# Altium PCB PCB1.PcbDoc (part 2 of 2)
Units mm, origin at the board's own origin, x right, y up, seen from the top; angles counter-clockwise.
Board outline 127.5 x 103 mm, 2 copper layers (Top Layer, Bottom Layer); 113 components, 82 nets, 373 pads, 162 vias.
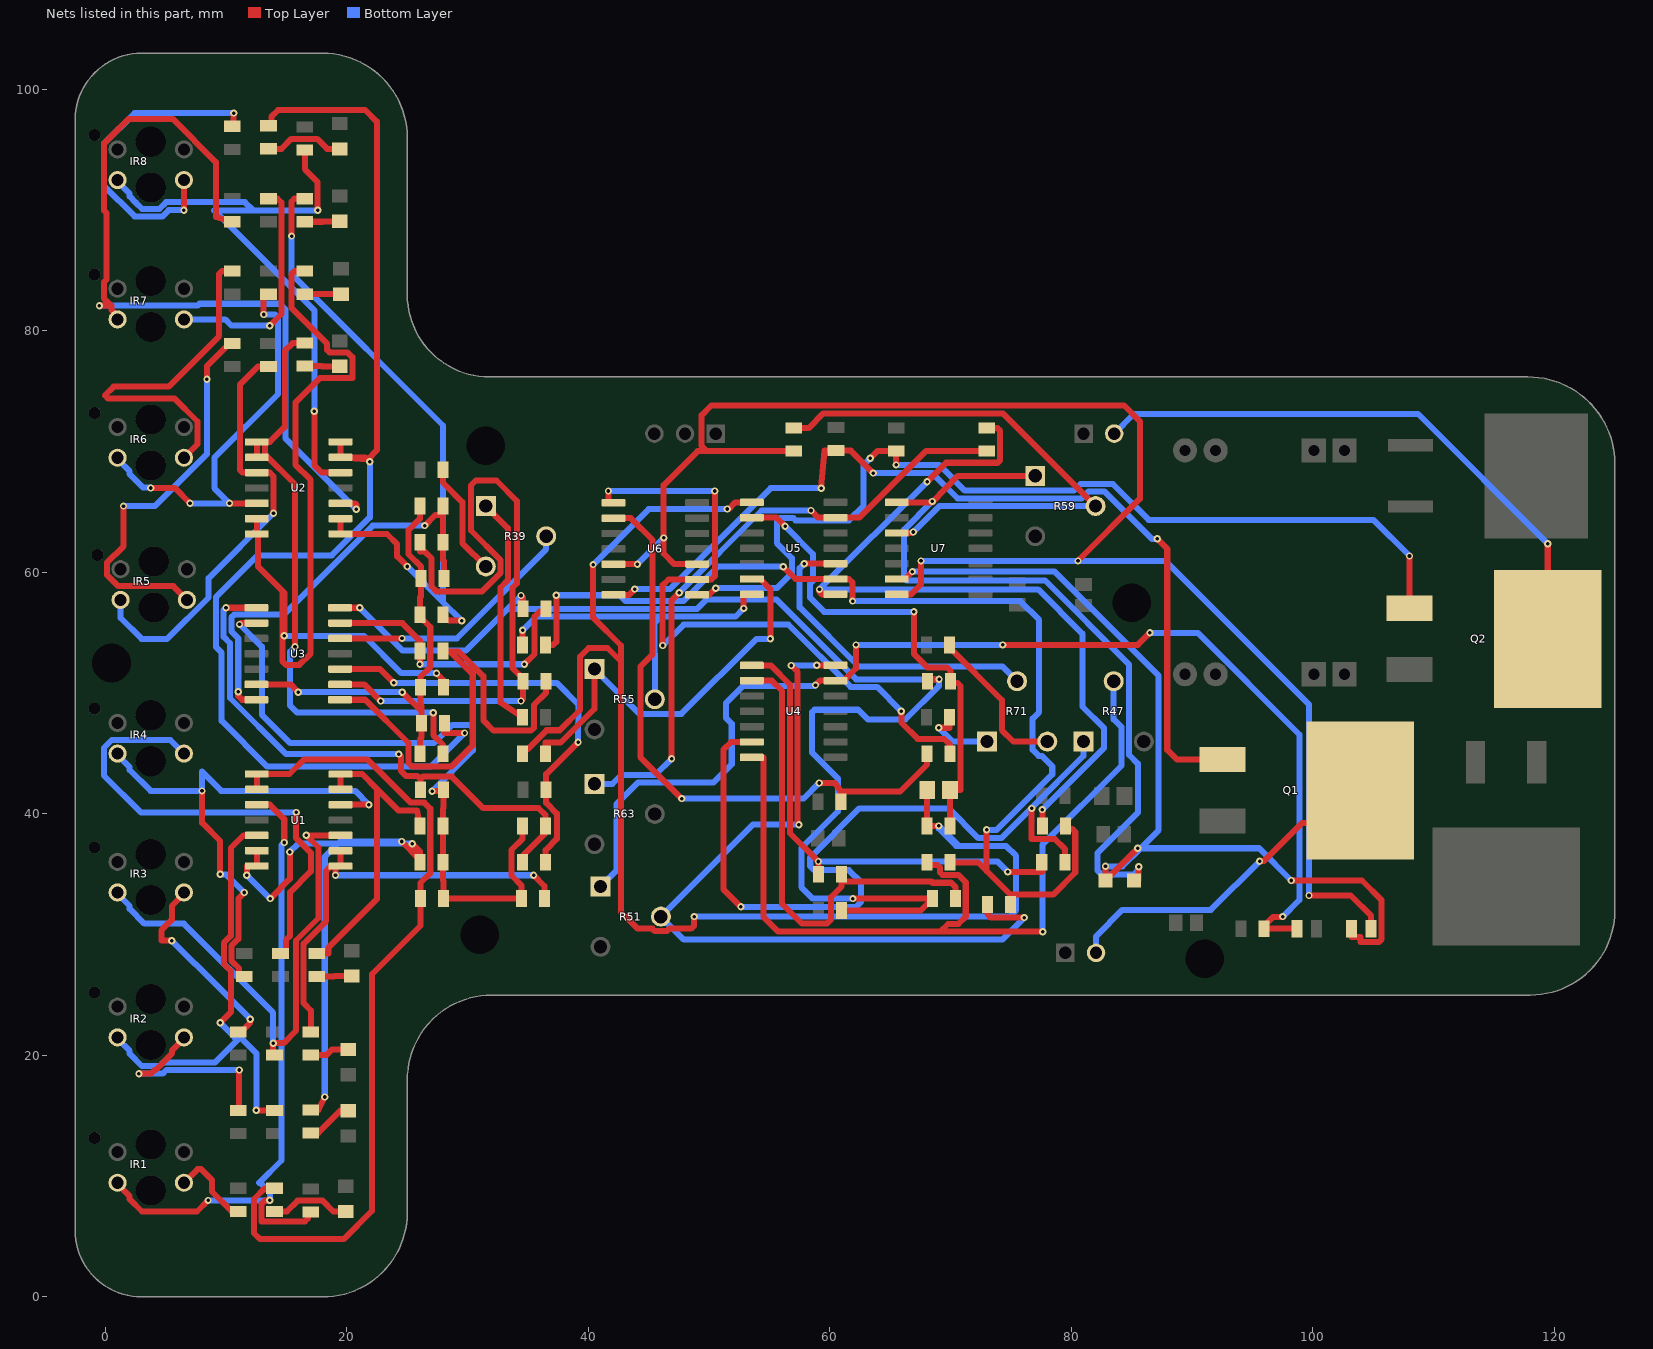
[diagram p2: the nets of this part, all layers, seen from the top]

## Via types
v1: diameter 0.6, hole 0.3, Top Layer to Bottom Layer, 162 vias

## Nets (pads, with @x,y where several pads share a name; then routed paths per layer and width w, separated by ;. In a path a pad name is that pad's centre, name@x,y a point inside that pad or via, vN(x,y) a via of type N, cw(c..) or ccw(c..) an arc to the next point about the centre after c; other vN are vias at no path point) (continued)
NetC3_2: C3.2 R51.1 R53.2 U4.13 | length 98.5
  Top Layer w0.5: v1(58.801,50.673) 59.168,51.04 U4.13@60.465,51.04 61.145,51.04 62.154,52.049 v1(62.154,54) ; v1(74.303,54) 85.5,54 v1(86.5,55) ; v1(97.5,31.5) 97.481,31.481 96.706,31.481 95.955,30.73 R53.2@95.955,30.5 C3.2@98.687,30.5
  Bottom Layer w0.5: R51.1@41,34 42.342,35.342 42.342,40.843 44.094,42.596 50.343,42.596 51.867,44.12 51.867,47.473 51.41,47.93 51.41,49.2 52.827,50.617 58.745,50.617 v1(58.801,50.673) ; v1(62.154,54) v1(74.303,54) ; v1(86.5,55) 90.461,55 98.888,46.574 98.888,32.888 v1(97.5,31.5)
NetC4_1: C4.1 R54.1 R56.2 U5.2 | length 40.6
  Top Layer w0.5: U5.2@53.535,64.54 55.577,64.54 v1(56.286,63.83) ; v1(66.954,56.744) 66.954,53.264 68.072,52.146 69.698,52.146 70,51.844 R56.2@70,51 70,50.851 70.561,50.851 70.815,50.597 70.815,42 C4.1@69.95,42 69.95,40.493 69.955,40.488 R54.1@69.955,39
  Bottom Layer w0.5: v1(56.286,63.83) 58.598,61.519 58.598,59.309 58.356,59.068 58.356,57.912 59.525,56.744 v1(66.954,56.744)
NetC4_2: C4.2 R54.2 R57.1 U5.1 | length 112.9
  Top Layer w0.5: R57.1@34.545,45 34.545,45.364 34.976,45.364 36.544,46.933 37.622,46.933 39.298,48.609 39.298,53.035 40.009,53.746 41.58,53.746 42.697,52.629 ; v1(40.386,60.655) 40.386,56.261 42.697,53.95 42.697,52.629 ; v1(48.758,31.5) 48.739,31.481 48.739,30.739 48.5,30.5 46.7,30.5 46.498,30.298 45.502,30.298 45.3,30.5 44.074,30.5 42.697,31.877 42.697,52.629 ; v1(51.486,65.253) 51.614,65.253 52.172,65.81 U5.1@53.535,65.81 ; R54.2@68.045,39 R54.2@68.045,39.014 ; C4.2@68.05,42 68.05,40.493 68.045,40.488 R54.2@68.045,39.014 ; v1(69.012,39.014) R54.2@68.045,39.014
  Bottom Layer w0.5: v1(40.386,60.655) 44.983,65.253 v1(51.486,65.253) ; v1(48.758,31.5) 74.883,31.5 75.413,32.029 75.413,36.525 74.574,37.363 70.663,37.363 ; 70.663,37.363 70.46,37.363 69.012,38.811 v1(69.012,39.014) 70.663,37.363
NetC5_1: C5.1 R58.2 U7.6 | length 77.8
  Top Layer w0.5: U7.6@65.535,59.46 66.218,59.46 v1(66.829,60.071) ; v1(82.825,35.662) R58.2@82.825,34.5 v1(85.485,37.16) ; v1(98.211,34.493) 104.064,34.493 105.664,32.893 105.664,29.591 105.461,29.388 103.937,29.388 103.937,29.794 103.187,29.794 C5.1@103.187,30.5
  Bottom Layer w0.5: v1(66.829,60.071) 78.613,60.071 87.224,51.46 87.224,38.659 v1@85.725,37.16 ; v1(82.825,35.662) 84.226,35.662 v1@85.725,37.16 ; v1(85.485,37.16) v1@85.725,37.16 ; v1(98.211,34.493) 95.544,37.16 v1@85.725,37.16
NetD1_1: D1.1 R1.1 | length 2.9
  Top Layer w0.5: R1.1@16.5,77.09 17.932,77.09 17.945,77.077 D1.1@19.398,77.077
NetD2_1: D2.1 R2.1 | length 6.6
  Top Layer w0.5: R2.1@14,7.09 15.037,7.09 15.922,7.976 17.983,7.976 18.882,7.077 D2.1@19.898,7.077
NetD3_1: D3.1 R7.1 | length 3
  Top Layer w0.5: R7.1@16.5,83.045 D3.1@19.5,83.045
NetD4_1: D4.1 R8.1 | length 3.9
  Top Layer w0.5: R8.1@17,13.59 17.628,13.59 19.461,15.423 D4.1@20.102,15.423
NetD5_1: D5.1 R13.1 | length 2.9
  Top Layer w0.5: R13.1@16.5,89.045 17.964,89.045 17.996,89.077 D5.1@19.398,89.077
NetD6_1: D6.1 R14.1 | length 3.3
  Top Layer w0.5: R14.1@17,20.045 18.313,20.045 18.768,20.5 D6.1@20.102,20.5
NetD7_1: D7.1 R19.1 | length 6.6
  Top Layer w0.5: R19.1@13.5,95.09 14.58,95.09 15.4,95.91 17.526,95.91 18.359,95.077 D7.1@19.398,95.077
NetD8_1: D8.1 R20.1 | length 2.9
  Top Layer w0.5: R20.1@17.5,26.545 18.923,26.545 18.955,26.577 D8.1@20.398,26.577
NetIR1_A: IR1.A R5.2 | length 7
  Top Layer w0.5: IR1.A@6.5,9.46 7.632,10.592 7.925,10.592 8.814,9.703 8.814,8.738 10.461,7.09 R5.2@11,7.09
NetIR1_COLL: IR1.COLL R6.1 U1.3 | length 56.8
  Top Layer w0.5: IR1.COLL@1,9.46 1,9.339 2,8.339 2,8.105 3.025,7.08 7.58,7.08 v1(8.5,8) ; U1.3@12.535,40.77 13.614,40.77 14.808,39.576 v1(14.808,37.643) ; v1(13.614,8.001) 13.212,8.001 12.933,7.722 12.933,6.248 16.51,6.248 16.764,6.502 16.764,7.045 R6.1@17,7.045
  Bottom Layer w0.5: v1@8.501,8 v1(13.614,8.001) 13.614,8.661 12.816,9.46 12.737,9.46 14.58,11.303 14.58,37.414 v1(14.808,37.643)
NetIR2_A: IR2.A R11.2 | length 17
  Top Layer w0.5: v1(2.774,18.491) 2.793,18.51 3.788,18.51 4.074,18.796 4.151,18.796 5.5,20.145 5.5,20.379 6.5,21.379 IR2.A@6.5,21.5 ; R11.2@11,15.455 11.074,15.455 v1(11.074,18.796)
  Bottom Layer w0.5: v1(2.774,18.491) 4.733,18.491 5.038,18.796 v1(11.074,18.796)
NetIR2_COLL: IR2.COLL R12.1 U1.5 | length 40.5
  Top Layer w0.5: v1(9.5,22.706) 10.389,23.594 10.389,26.997 9.806,27.579 9.806,29.331 10.389,29.913 10.389,37.186 11.433,38.23 U1.5@12.535,38.23 ; v1(12.497,15.455) R12.1@14,15.455
  Bottom Layer w0.5: IR2.COLL@1,21.5 1,21.379 2,20.379 2,20.145 3.025,19.12 4.475,19.12 4.778,19.423 9.087,19.423 11.164,21.5 ; v1(9.5,22.706) 10.706,21.5 11.164,21.5 ; v1(12.497,15.455) 12.497,20.168 11.164,21.5
NetIR3_A: IR3.A R17.2 | length 16.4
  Top Layer w0.5: v1(5.5,29.5) 5.481,29.519 4.626,29.519 4.626,30.355 5.5,31.229 5.5,32.379 6.5,33.379 IR3.A@6.5,33.5 ; R17.2@11,21.955 11.23,21.955 11.981,22.706 11.981,22.981 v1(12,23)
  Bottom Layer w0.5: v1(5.5,29.5) 7.442,27.558 7.477,27.558 11.981,23.053 11.981,23.019 v1(12,23)
NetIR3_COLL: IR3.COLL R18.1 U1.10 | length 43.3
  Top Layer w0.5: R18.1@14,20.045 13.894,20.045 v1(13.894,21.006) 13.913,21.025 14.753,21.025 15.781,22.053 15.781,29.519 17.645,31.383 17.645,37.222 v1(16.637,38.23) U1.10@19.465,38.23
  Bottom Layer w0.5: IR3.COLL@1,33.5 1,33.379 2,32.379 2,32.145 3.224,30.921 6.5,30.921 13.894,23.527 v1(13.894,21.006)
NetIR4_A: IR4.A R23.2 | length 40.2
  Top Layer w0.5: R23.2@14.5,28.455 14.73,28.455 14.94,28.665 14.94,29.564 15.291,29.915 15.291,33.528 17.018,35.255 17.018,36.779 15.799,37.998 v1(15.799,40.132)
  Bottom Layer w0.5: IR4.A@6.5,45 5.373,46.127 0.533,46.127 -0.127,45.467 -0.127,43.189 2.93,40.132 v1(15.799,40.132)
NetIR4_COLL: IR4.COLL R24.1 U1.12 | length 45.5
  Top Layer w0.5: v1(8,41.91) 8,39.264 9.5,37.764 v1(9.5,35) ; R24.1@11.5,26.545 11.27,26.545 11.06,26.755 11.06,27.212 10.433,27.839 10.433,29.071 11.016,29.654 11.016,32.989 11.5,33.473 v1(11.5,33.5) ; U1.12@19.465,40.77 v1(21.819,40.77)
  Bottom Layer w0.5: IR4.COLL@1,45 1,44.879 2,43.879 2,43.645 3.735,41.91 v1(8,41.91) 8,43.5 9.59,41.91 20.679,41.91 v1(21.819,40.77) ; v1(9.5,35) 9.519,34.981 10.019,34.981 v1(11.5,33.5)
NetIR5_A: IR5.A R3.2 | length 32.6
  Top Layer w0.5: v1(1.5,65.5) 1.5,62.186 0.123,60.809 0.123,59.803 1.064,58.862 5.618,58.862 IR5.A@6.75,57.73 ; v1(8.4,76) 8.4,77.085 10.27,78.955 R3.2@10.5,78.955
  Bottom Layer w0.5: v1(1.5,65.5) 4.094,65.5 8.4,69.806 v1(8.4,76)
NetIR5_COLL: IR5.COLL R4.1 U2.3 | length 36.3
  Top Layer w0.5: R4.1@13.5,77.045 12.624,77.045 11.151,75.572 11.151,68.478 11.359,68.27 U2.3@12.535,68.27 13.614,68.27 13.919,67.965 v1(13.919,64.899)
  Bottom Layer w0.127: IR5.COLL@1.25,57.639 IR5.COLL@1.25,57.73
  Bottom Layer w0.5: IR5.COLL@1.25,57.73 1.25,56.25 3,54.5 5.114,54.5 8.542,57.928 8.542,59.522 v1(13.919,64.899)
NetIR6_A: IR6.A R9.2 | length 29.9
  Top Layer w0.5: IR6.A@6.5,69.5 7.627,70.627 7.627,72.507 5.714,74.42 0.201,74.42 -0.04,74.661 0.686,75.387 5.232,75.387 9.423,79.578 9.423,84.734 9.644,84.955 R9.2@10.5,84.955
NetIR6_COLL: IR6.COLL R10.1 U2.5 | length 34.7
  Top Layer w0.5: v1(3.75,67) 5.73,67 v1(7,65.73) ; v1(10.27,65.73) U2.5@12.535,65.73 ; v1(13.106,81.369) 13.106,83.045 R10.1@13.5,83.045
  Bottom Layer w0.5: IR6.COLL@1,69.5 1,69.379 2,68.379 2,68.145 3.126,67.019 3.731,67.019 v1(3.75,67) ; v1(7,65.73) v1(10.27,65.73) 9.023,66.977 9.023,69.5 14.291,74.769 14.291,81.098 14.021,81.369 v1(13.106,81.369)
NetIR7_A: IR7.A R15.2 | length 19.1
  Top Layer w0.5: R15.2@13.5,90.955 14.252,90.955 14.58,90.627 14.58,81.407 v1(13.614,80.442)
  Bottom Layer w0.5: IR7.A@6.5,80.96 9.92,80.96 10.438,80.442 v1(13.614,80.442)
NetIR7_COLL: IR7.COLL R16.1 U2.10 | length 70.2
  Top Layer w0.5: v1(-0.5,82.093) 0.483,82.093 ; IR7.COLL@1,80.96 1,81.231 0.483,81.748 0.483,82.093 ; R16.1@10.5,89.045 9.144,89.451 9.144,93.99 5.572,97.561 1.928,97.561 -0.127,95.507 -0.127,90 0.1,89.773 0.1,84.266 -0.127,84.039 -0.127,82.702 0.483,82.093 ; U2.10@19.465,65.73 20.681,65.73 20.777,65.634 v1(20.777,65.227)
  Bottom Layer w0.5: v1(-0.5,82.093) 7.633,82.093 7.797,82.257 14.427,82.257 14.918,81.765 14.918,71.086 v1(20.777,65.227)
NetIR8_A: IR8.A R21.2 | length 26.9
  Top Layer w0.5: v1(6.5,90) IR8.A@6.5,92.5 ; R21.2@10.5,96.955 10.617,96.955 v1(10.617,98.044)
  Bottom Layer w0.5: v1(6.5,90) 5.242,90 4.735,89.493 2.413,89.493 -0.127,92.033 -0.127,95.507 2.41,98.044 v1(10.617,98.044)
NetIR8_COLL: IR8.COLL R22.1 U2.12 | length 54
  Top Layer w0.5: R22.1@16.5,94.995 16.51,94.995 16.51,93.396 17.577,92.329 v1(17.577,89.992) ; v1(17.297,73.355) 17.297,68.885 17.912,68.27 U2.12@19.465,68.27
  Bottom Layer w0.254: IR8.COLL@1,92.319 IR8.COLL@1,92.5
  Bottom Layer w0.5: IR8.COLL@1,92.319 1.06,92.319 2,91.379 2,91.145 2.518,90.627 3.025,90.12 4.475,90.12 5.032,90.677 11.542,90.677 12.227,89.992 ; v1(17.297,73.355) 17.297,81.703 9.008,89.992 12.227,89.992 ; v1(17.577,89.992) 12.227,89.992
NetJ1_02: J1.02 Q1.2 | length 29.9
  Top Layer w0.5: v1(95.58,36.093) 95.936,36.093 99.085,39.243 103.93,39.243 Q1.2@103.93,41.96
  Bottom Layer w0.5: J1.02@82.04,28.5 82.04,29.87 84.224,32.055 91.542,32.055 v1(95.58,36.093)
NetJ2_02: J2.02 Q2.2 | length 48.9
  Top Layer w0.5: Q2.2@119.445,54.5 119.445,62.371 v1(119.456,62.382)
  Bottom Layer w0.5: J2.02@83.54,71.5 85.167,73.127 108.712,73.127 v1(119.456,62.382)
NetQ1_1: Q1.1 R72.1 U6.7 | length 77.8
  Top Layer w0.5: U6.7@42.07,58.15 43.367,58.15 v1(43.84,58.623) ; v1(59.272,66.98) 59.538,70.09 R72.1@60.5,70.09 61.736,70.09 v1(63.597,68.229) ; v1(87.097,62.789) 87.935,61.951 87.935,45.314 88.748,44.5 Q1.1@92.5,44.5
  Bottom Layer w0.5: v1(43.84,58.623) 46.736,58.623 55.093,66.98 v1(59.272,66.98) ; v1(63.597,68.229) 68.478,68.229 70.566,66.142 80.848,66.142 81.409,66.702 82.752,66.702 86.665,62.789 v1(87.097,62.789)
NetQ2_1: Q2.1 R73.1 U6.8 | length 79.4
  Top Layer w0.5: U6.8@49,58.15 49.987,58.15 v1(50.537,58.699) ; v1(63.348,69.469) 63.924,70.045 R73.1@65.481,70.045 ; v1(65.481,68.91) R73.1@65.481,70.045 ; R73.1@65.5,70.045 R73.1@65.481,70.045 ; v1(108.001,61.366) 108.001,57.04 Q2.1@108.015,57.04
  Bottom Layer w0.5: v1(50.537,58.699) 55.601,58.699 56.845,59.944 56.845,61.189 55.601,62.433 55.601,64.228 55.88,64.507 56.972,64.507 57.167,64.313 61.57,64.313 62.789,65.532 62.789,68.91 v1(63.348,69.469) ; v1(65.481,68.91) 69.041,68.91 71.175,66.777 80.205,66.777 80.758,67.329 83.42,67.329 86.385,64.364 105.004,64.364 v1(108.001,61.366)
NetR25_1: R25.1 R26.2 R27.1 R29.2 R31.2 R35.2 U3.2 | length 58.7
  Top Layer w0.5: v1(11.1,55.702) 11.208,55.81 U3.2@12.5,55.81 ; v1(27.051,41.885) R25.1@28,41.885 ; R25.1@28,42 R25.1@28,41.885 ; R27.1@34.545,39 34.545,37.949 33.63,37.033 33.63,34.907 34.45,34.087 R31.2@34.45,33 R26.2@28,33 28,34.468 27.955,34.513 R29.2@27.955,36 R35.2@27.955,39 27.955,40.462 28,40.507 R25.1@28,41.885
  Bottom Layer w0.5: v1(11.1,55.702) 12.954,53.848 12.954,48.235 15.316,45.872 27.212,45.872 28.727,47.388 30.184,47.388 30.429,47.142 30.429,45.263 v1(27.051,41.885)
NetR28_1: R28.1 R33.2 U3.13 | length 23.5
  Top Layer w0.5: U3.13@19.43,55.81 24.591,55.81 26.045,54.356 R33.2@26.045,53.5 v1(26.045,52.4) ; v1(34.696,52.4) 35.535,53.238 35.535,56.337 35.966,56.769 36.5,56.769 R28.1@36.5,57
  Bottom Layer w0.5: v1(26.045,52.4) v1(34.696,52.4)
NetR30_1: R30.1 R32.2 U3.9 | length 56.4
  Top Layer w0.5: U3.9@19.43,50.73 21.431,50.73 v1(22.809,49.352) ; R32.2@26.045,62.5 26.045,61.747 26.416,61.747 27,61.163 27,58.852 27.432,58.42 31.178,58.42 32.702,59.944 32.702,61.049 30.277,63.475 30.277,67.208 30.683,67.615 32.385,67.615 34.087,65.913 34.087,59.099 33.706,58.718 33.706,52.091 34.59,51.206 R30.1@34.59,51 34.59,49.525 v1(34.417,49.352)
  Bottom Layer w0.5: v1(22.809,49.352) v1(34.417,49.352)
NetR30_2: R30.2 R33.1 U3.8 | length 40.3
  Top Layer w0.5: U3.8@19.43,49.46 21.514,49.46 25.096,45.878 25.096,44.221 25.4,43.917 28.651,43.917 30.42,45.686 30.42,51.571 28.524,53.467 ; R33.1@27.955,53.5 27.955,53.467 28.524,53.467 ; R30.2@36.5,51 36.5,50.038 35.484,49.022 35.484,47.142 35.255,46.914 32.131,46.914 31.293,47.752 31.293,51.41 29.235,53.467 28.524,53.467
NetR34_2: R34.2 R36.2 U3.10 | length 35.9
  Top Layer w0.5: U3.10@19.43,52 22.746,52 v1(23.886,50.86) ; R34.2@36.455,36 36.455,37.008 37.389,37.942 37.389,40.03 36.5,40.919 R36.2@36.5,42 36.5,43.307 v1(39.141,45.948)
  Bottom Layer w0.5: v1(23.886,50.86) 37.365,50.86 39.177,49.048 39.177,47.53 39.141,47.494 v1(39.141,45.948)
NetR37_2: R37.2 R39.1 | length 19.5
  Top Layer w0.5: R39.1@31.5,65.5 33.329,63.671 33.329,59.37 32.715,58.756 32.715,49.225 R37.2@34.545,48
NetR38_1: R38.1 R39.3 | length 9.5
  Top Layer w0.5: R38.1@27.955,68.5 27.955,67.437 29.566,65.826 29.566,62.434 R39.3@31.5,60.5
NetR39_2: R39.2 U3.12 | length 21.2
  Top Layer w0.5: U3.12@19.43,54.54 v1(24.556,54.54)
  Bottom Layer w0.5: v1(24.556,54.54) 29.115,54.54 36.5,61.925 R39.2@36.5,63
NetR40_2: R40.2 R41.1 R42.1 R43.2 R44.2 R45.2 U3.6 | length 36.8
  Top Layer w0.5: U3.6@12.5,50.73 15.335,50.73 v1(15.977,50.089) ; v1(24.585,50.089) 26.185,48.489 ; R40.2@26.045,45 26.045,46.177 26.185,46.317 R45.2@26.185,47.5 26.185,48.489 ; R42.1@26.045,65.5 26.045,64.45 25.095,63.5 25.095,61.522 26.14,60.477 R41.1@26.14,59.5 26.14,58.032 26.045,57.937 R44.2@26.045,56.5 26.045,56.337 26.899,55.484 26.899,52.164 26.09,51.356 R43.2@26.09,50.5 26.09,49.041 26.185,48.946 26.185,48.489
  Bottom Layer w0.5: v1(15.977,50.089) v1(24.585,50.089)
NetR46_1: R46.1 R48.2 U4.2 | length 40
  Top Layer w0.5: U4.2@53.535,51.04 55.183,51.04 56.032,50.19 56.032,32.563 57.683,30.912 59.741,30.912 60.096,31.267 60.096,33.122 60.955,33.98 R46.1@60.955,34.392 ; R46.1@60.955,35 R46.1@60.955,34.392 ; R48.2@70.41,33 70.41,33.934 70.038,34.306 68.491,34.306 68.405,34.392 R46.1@60.955,34.392
NetR46_2: R46.2 R49.1 U4.1 | length 40.2
  Top Layer w0.5: U4.1@53.535,52.31 55.102,52.31 56.693,50.719 56.693,38.42 v1(59.045,36.068) R46.2@59.045,35 ; v1(74.727,35.204) 77.545,35.204 R49.1@77.545,36
  Bottom Layer w0.5: v1(59.045,36.068) 73.863,36.068 v1(74.727,35.204)
NetR47_1: R47.1 R49.2 U4.6 | length 69.6
  Top Layer w0.5: v1(52.629,32.309) 51.181,33.757 51.181,45.325 51.816,45.96 U4.6@53.535,45.96 ; v1(76.708,40.463) 76.708,37.922 78.638,37.922 79.455,37.106 R49.2@79.455,36
  Bottom Layer w0.5: v1(52.629,32.309) 62.179,32.309 62.586,32.715 62.586,34.341 61.57,35.357 58.699,35.357 58.368,35.688 58.368,36.388 62.442,40.462 69.825,40.462 72.288,37.998 74.192,37.998 v1@76.682,40.488 ; v1(76.708,40.463) v1@76.682,40.488 ; R47.1@81,46 81,44.806 v1@76.682,40.488
NetR55_1: R55.1 R57.2 U5.6 | length 34.1
  Top Layer w0.5: R57.2@36.455,45 36.455,45.902 37.689,45.902 40.5,48.714 R55.1@40.5,52 ; U5.6@53.535,59.46 54.215,59.46 55.067,58.608 v1(55.067,54.508)
  Bottom Layer w0.5: R55.1@40.5,52 44.215,48.285 47.701,48.285 53.924,54.508 v1(55.067,54.508)
NetR58_1: R58.1 R59.1 U7.1 | length 65.6
  Top Layer w0.5: U7.1@65.535,65.81 v1@68.478,65.81 ; v1(68.478,65.888) v1@68.478,65.81 ; R59.1@77,68 70.591,68 68.517,65.85 v1@68.478,65.81 ; R58.1@85.175,34.5 85.573,34.5 v1(85.573,35.636)
  Bottom Layer w0.5: v1(68.478,65.888) 66.142,63.551 66.142,59.538 66.345,59.334 77.826,59.334 84.785,52.375 84.785,44.882 85.496,44.171 85.496,40.107 82.144,36.754 82.144,35.331 82.499,34.976 85.141,34.976 85.573,35.408 v1(85.573,35.636)
NetR59_2: R59.2 R60.1 U7.3 | length 46.1
  Top Layer w0.5: R60.1@57,71.955 58.239,71.955 59.461,73.177 74.323,73.177 R59.2@82,65.5 ; U7.3@65.535,63.27 66.826,63.27 v1(66.904,63.348)
  Bottom Layer w0.5: v1(66.904,63.348) 69.056,65.5 R59.2@82,65.5
NetR61_1: R61.1 R62.2 R64.2 R66.2 U5.9 | length 91.1
  Top Layer w0.5: R66.2@36.455,54 36.455,53.975 37.059,53.975 37.338,54.254 v1(37.338,58.115) ; v1(56.134,60.477) 57.151,59.46 U5.9@60.465,59.46 61.57,59.46 61.874,59.155 v1(61.874,57.633) ; R62.2@69.955,36 69.955,35.992 72.263,35.992 72.974,35.281 ; v1(72.974,38.684) 72.974,35.281 ; R64.2@74.955,32.5 74.955,33.3 ; R61.1@79.5,39 79.5,38.76 80.061,38.76 80.315,38.506 80.315,35.154 78.486,33.325 74.955,33.325 74.955,33.3 ; 72.974,35.281 74.955,33.3
  Bottom Layer w0.5: v1(37.338,58.115) 42.604,58.115 43.086,57.633 47.862,57.633 50.707,60.477 v1(56.134,60.477) ; v1(61.874,57.633) 75.768,57.633 77.329,56.072 77.329,48.437 76.784,47.892 76.784,45.314 77.292,44.806 77.546,44.806 78.41,43.942 78.41,43.282 73.812,38.684 v1(72.974,38.684)
NetR61_2: R61.2 R65.1 U5.8 | length 66.7
  Top Layer w0.5: v1(59.131,58.596) 59.131,58.393 59.334,58.19 U5.8@60.465,58.19 ; v1(68.048,67.513) 69.623,69.088 73.889,69.088 74.092,69.291 74.092,71.73 73.866,71.955 R65.1@73,71.955 ; R61.2@77.59,39 v1(77.59,40.361)
  Bottom Layer w0.5: v1(68.048,67.513) v1(59.131,58.596) 77.243,58.596 80.899,54.94 80.899,48.902 82.702,47.099 82.702,45.473 v1(77.59,40.361)
NetR63_1: R63.1 R65.2 U5.13 | length 52.1
  Top Layer w0.5: v1(46.888,44.577) 46.888,57.693 v1(47.514,58.318) ; v1(58.435,65.134) 59.03,64.54 U5.13@60.465,64.54 62.44,64.54 67.945,70.045 R65.2@73,70.045
  Bottom Layer w0.5: R63.1@40.5,42.5 41.992,42.5 42.723,43.231 45.542,43.231 v1(46.888,44.577) ; v1(47.514,58.318) 54.33,65.134 v1(58.435,65.134)
NetR67_1: R67.1 R70.2 U6.2 | length 51.2
  Top Layer w0.5: U6.2@42.07,64.5 43.51,64.5 45.322,62.689 45.322,53.221 44.298,52.197 44.298,44.704 v1(47.727,41.275) ; v1(59.106,42.57) 60.402,42.57 60.91,41.859 ; R70.2@60.91,41 60.91,41.859 ; R67.1@68.045,45 68.045,44.094 65.81,41.859 60.91,41.859
  Bottom Layer w0.5: v1(47.727,41.275) 57.81,41.275 v1(59.106,42.57)
NetR68_2: R68.2 R71.1 | length 6.2
  Top Layer w0.5: v1(69.012,47.142) 69.91,47.142 R68.2@69.91,48
  Bottom Layer w0.5: v1(69.012,47.142) 70.154,46 R71.1@73,46
NetR69_1: R69.1 R71.3 | length 13
  Top Layer w0.5: R69.1@69.91,54 69.91,53.772 74.244,49.438 74.244,46.939 75.183,46 R71.3@78,46
NetR71_2: R71.2 U5.10 | length 26.9
  Top Layer w0.5: v1(57.875,60.73) U5.10@60.465,60.73
  Bottom Layer w0.5: v1(57.875,60.73) 57.497,60.351 57.497,57.108 62.408,52.197 74.303,52.197 R71.2@75.5,51
right_s: R67.2 U6.1 U6.9 | length 56.8
  Top Layer w0.5: v1(41.656,66.751) 41.656,65.77 U6.1@42.07,65.77 ; v1(46.152,53.95) 46.152,58.944 46.628,59.42 U6.9@49,59.42 50.19,59.42 50.47,59.699 v1(50.47,66.751) ; v1(65.913,48.515) 65.913,47.574 67.259,46.228 69.447,46.228 69.955,45.72 R67.2@69.955,45
  Bottom Layer w0.5: v1(41.656,66.751) v1(50.47,66.751) ; v1(46.152,53.95) 47.879,55.677 56.566,55.677 61.722,50.521 63.908,50.521 v1(65.913,48.515)
triangular: C5.2 R60.2 U6.5 U6.10 U7.7 | length 143.9
  Top Layer w0.5: U6.5@42.07,60.69 v1(44.053,60.69) ; U6.10@49,60.69 47.108,60.69 46.228,61.57 v1(46.228,62.865) 46.228,67.226 49.047,70.045 49.792,70.045 ; R60.2@57,70.045 49.792,70.045 ; U7.7@65.535,58.19 66.717,58.19 67.539,59.012 v1(67.539,60.96) ; v1(80.543,60.96) 85.674,66.091 85.674,72.517 84.353,73.838 50.19,73.838 49.378,73.025 49.378,70.46 49.792,70.045 ; v1(99.67,33.249) 103.124,33.249 104.813,31.56 C5.2@104.813,30.5
  Bottom Layer w0.5: v1(44.053,60.69) v1(46.228,62.865) ; v1(67.539,60.96) v1(80.543,60.96) 87.782,60.96 99.67,49.073 v1(99.67,33.249)
Vd: R51.2 R64.1 U4.14 | length 67.3
  Top Layer w0.5: v1(56.794,52.299) 57.322,51.771 57.322,39.223 v1(57.429,39.116) ; v1(58.903,52.31) U4.14@60.465,52.31 ; R64.1@73.045,32.5 73.045,31.699 73.324,31.42 v1(76.098,31.42)
  Bottom Layer w0.5: v1(56.794,52.299) 58.891,52.299 v1(58.903,52.31) ; v1(57.429,39.116) 53.616,39.116 R51.2@46,31.5 47.909,29.591 74.27,29.591 v1(76.098,31.42)
Ve: R28.2 R48.1 R52.1 R56.1 U3.14 | length 107.9
  Top Layer w0.5: U3.14@19.43,57.08 v1(21.057,57.08) ; v1(34.417,58.09) 34.59,57.917 R28.2@34.59,57 ; R52.1@60.955,32 67.5,32 R48.1@68.5,33 61.905,33 v1(61.9,32.995) ; R56.1@68.09,51 68.09,51.156 v1(69.037,51.156)
  Bottom Layer w0.5: v1(21.057,57.08) 24.593,53.543 29.87,53.543 33.29,56.963 ; v1(34.417,58.09) 33.29,56.963 ; v1(61.9,32.995) 58.572,32.995 57.633,33.934 57.633,37.186 60.655,40.208 60.655,42.951 58.522,45.085 58.522,48.429 58.725,48.632 62.34,48.632 63.144,47.828 66.26,47.828 69.037,50.606 v1(69.037,51.156) 62.179,51.156 55.591,57.743 49.743,57.743 48.971,56.972 45.579,56.972 45.571,56.963 33.29,56.963
Vin1: R2.2 R26.1 U1.1 U1.2 | length 69
  Top Layer w0.5: U1.2@12.535,42.04 U1.1@12.535,43.31 15.24,43.31 16.456,44.526 21.692,44.526 25.285,40.933 26.402,40.933 26.899,40.437 26.899,35.103 26.09,34.294 R26.1@26.09,33 26.09,30.759 22.073,26.742 22.073,7.137 19.719,4.783 12.816,4.783 12.306,5.293 12.306,8.115 13.191,9 R2.2@14,9
Vin2: R8.2 R29.1 U1.6 U1.7 | length 53.1
  Top Layer w0.5: v1(11.709,34.925) 11.709,35.69 U1.7@12.535,35.69 U1.6@12.535,36.96 ; v1(13.64,32.995) 15.265,34.62 v1(15.265,36.855) ; R8.2@17,15.5 17.628,15.5 v1(18.161,16.561) ; v1(24.546,37.719) R29.1@26.045,36.22 ; v1(25.4,37.541) 26.045,36.896 R29.1@26.045,36.22 ; R29.1@26.045,36 R29.1@26.045,36.22
  Bottom Layer w0.5: v1(11.709,34.925) v1(13.64,32.995) ; v1(15.265,36.855) 15.951,37.541 19.253,37.541 ; v1(18.161,16.561) 18.161,36.449 19.253,37.541 ; v1(24.546,37.719) 19.431,37.719 19.253,37.541 ; v1(25.4,37.541) 19.253,37.541
Vin3: R14.2 R31.1 U1.8 U1.9 | length 36.5
  Top Layer w0.5: R14.2@17,21.955 17.018,21.955 17.018,23.724 16.408,24.333 16.408,29.259 18.272,31.123 18.272,35.278 18.629,35.635 18.995,35.635 U1.8@19.05,35.69 ; v1(19.05,34.925) U1.8@19.05,35.69 ; U1.9@19.465,36.96 U1.8@19.465,35.69 U1.8@19.05,35.69 ; v1(35.458,34.925) 36.36,34.023 R31.1@36.36,33
  Bottom Layer w0.5: v1(19.05,34.925) v1(35.458,34.925)
Vin4: R20.2 R35.1 U1.13 U1.14 | length 26.4
  Top Layer w0.5: R20.2@17.5,28.455 18.466,28.455 18.466,28.931 22.504,32.969 22.504,42.062 ; U1.13@19.465,42.04 U1.14@19.465,43.31 21.257,43.31 22.504,42.062 ; R35.1@26.045,39 25.82,40.306 24.261,40.306 22.504,42.062
Vin5: R1.2 R40.1 U2.1 U2.2 | length 51.2
  Top Layer w0.5: U2.2@12.535,69.54 U2.1@12.535,70.81 U2.1@13.208,70.81 ; v1(15.697,53.848) 15.697,67.305 13.208,69.794 U2.1@13.208,70.81 ; R1.2@16.5,79 15.5,79 14.859,78.359 14.859,72.055 13.614,70.81 U2.1@13.208,70.81 ; v1(27.153,48.387) 27.153,46.533 27.955,45.73 R40.1@27.955,45
  Bottom Layer w0.5: v1(15.697,53.848) 15.291,53.442 15.291,48.971 15.875,48.387 v1(27.153,48.387)
Vin6: R7.2 R43.1 U2.6 U2.7 | length 74.3
  Top Layer w0.5: U2.6@12.535,64.46 U2.7@12.535,63.19 12.624,63.19 12.624,60.503 14.672,58.454 ; v1(14.808,54.754) 14.808,58.318 14.672,58.454 ; R7.2@16.5,84.955 15.638,84.955 15.418,84.734 15.418,81.89 18.364,78.943 18.364,78.435 18.567,78.232 20.041,78.232 20.447,77.826 20.447,76.124 17.78,76.124 15.723,74.066 15.723,68.936 16.993,67.666 16.993,53.284 16.053,52.344 14.948,52.344 14.672,52.62 14.672,58.454 ; v1(27.416,51.664) 28,51.079 R43.1@28,50.5
  Bottom Layer w0.5: v1(14.808,54.754) 21.412,54.754 24.502,51.664 v1(27.416,51.664)
Vin7: R13.2 R44.1 U2.8 U2.9 | length 56.3
  Top Layer w0.5: v1(15.418,87.859) 15.418,90.726 15.646,90.955 R13.2@16.5,90.955 ; U2.9@19.465,64.46 U2.8@19.465,63.19 23.317,63.19 24.159,62.349 24.159,61.341 v1(25,60.5) ; R44.1@27.955,56.5 27.955,56.27 28.165,56.06 28.395,56.06 28.45,56.005 29.495,56.005 v1(29.5,56)
  Bottom Layer w0.5: v1(15.418,87.859) 15.418,84.706 27.955,72.169 27.955,57.545 ; v1(25,60.5) 27.955,57.545 ; v1(29.5,56) 27.955,57.545
Vin8: R19.2 R45.1 U2.13 U2.14 | length 100.6
  Top Layer w0.5: R19.2@13.5,97 13.741,97 13.741,97.739 14.3,98.298 21.514,98.298 22.479,97.333 22.479,70.124 v1@21.707,69.352 ; U2.14@19.465,70.81 U2.13@19.465,69.54 ; v1(21.895,69.164) v1@21.707,69.352 ; R45.1@28.095,47.5 28.095,46.711 v1(29.743,46.711) ; U2.13@19.465,69.54 v1@21.707,69.352 ; U2.13@19.465,69.54 21.519,69.54 v1@21.707,69.352
  Bottom Layer w0.5: v1(21.895,69.164) 21.895,64.567 18.745,61.417 12.598,61.417 9.169,57.988 9.169,53.821 9.627,53.363 9.627,47.705 13.415,43.917 26.949,43.917 v1(29.743,46.711)
Vintegrate: R55.2 R66.1 U5.7 | length 35.4
  Top Layer w0.5: R66.1@34.545,54 v1(34.545,55.22) ; v1(52.857,57.023) 52.857,58.19 U5.7@53.535,58.19
  Bottom Layer w0.5: v1(34.545,55.22) 35.661,56.336 45.973,56.336 ; R55.2@45.5,49.5 45.5,53.247 45.475,53.273 45.475,55.838 45.973,56.336 ; v1(52.857,57.023) 52.179,56.345 ; 45.973,56.336 45.981,56.345 52.179,56.345 ; 45.973,56.336 52.17,56.336 52.179,56.345
Vp: R47.2 R62.1 U4.7 | length 71.3
  Top Layer w0.5: U4.7@53.535,44.69 54.483,44.69 54.483,31.496 55.728,30.251 69.139,30.251 ; R62.1@68.045,36 68.045,35.763 68.91,35.763 69.113,35.56 69.113,35.154 69.334,34.933 70.655,34.933 71.247,34.341 71.247,31.496 70.637,30.886 69.774,30.886 69.139,30.251 ; v1(77.622,30.251) 69.139,30.251
  Bottom Layer w0.5: v1(77.622,30.251) 77.622,37.49 84.15,44.018 84.15,47.193 83.5,47.843 R47.2@83.5,51
Vsum+: R25.2 R27.2 R34.1 U3.1 | length 46.9
  Top Layer w0.5: v1(9.98,57.08) U3.1@12.5,57.08 ; v1(24.282,44.958) 24.469,44.771 24.469,43.57 24.884,43.155 25.811,43.155 26.09,42.875 ; R25.2@26.09,42 26.09,42.875 ; R34.1@34.545,36 34.545,36.525 36.455,38.435 R27.2@36.455,39 36.455,39.897 35.865,40.488 31.293,40.488 28.689,43.091 26.306,43.091 26.09,42.875
  Bottom Layer w0.5: v1(9.98,57.08) 9.796,56.896 9.796,54.661 10.312,54.144 10.312,49.606 14.961,44.958 v1(24.282,44.958)
Vsum-: R32.1 R41.2 R42.2 U3.7 | length 35.5
  Top Layer w0.5: v1(10.998,50.114) 10.998,49.784 11.322,49.46 U3.7@12.5,49.46 ; v1(26.441,63.881) 27.32,64.76 27.955,64.76 ; R42.2@27.955,65.5 27.955,64.76 ; R41.2@28.05,59.5 28.05,60.935 27.955,61.03 R32.1@27.955,62.5 27.955,64.76
  Bottom Layer w0.5: v1(10.998,50.114) 10.998,54.55 10.423,55.125 10.423,56.286 10.651,56.515 14.757,56.515 22.123,63.881 v1(26.441,63.881)
pads on no net: IR1. IR2. IR3. IR4. IR5. IR6. IR7. IR8. R47.3 R51.3 R55.3 R59.3 R63.3 U6.12 U6.13 U6.14 U7.8 U7.9 U7.10 U7.12 U7.13 U7.14

## Silkscreen, mask and mechanical layers (free items; w line width, h text height)
Top Overlay:
  text "- Analog Line Follower" at 105.461,26.286 h1.52
  text "Outlaws" at 94.3,25.8 h1.52

## Text inside footprints (layer, text, board x,y; h text height)
U9: Top Overlay "GND" at 91.182,68.711 h0.5 r180; Top Overlay "VCC-OUT" at 102.993,68.711 h0.5 r180; Top Overlay "GND" at 89.912,52.844 h0.5; Top Overlay "VCC-IN" at 99.945,52.844 h0.5